# Altium PCB PCB1.PcbDoc
Units mm, origin at the board's own origin, x right, y up, seen from the top; angles counter-clockwise.
Board outline 163.45 x 132.21 mm, 4 copper layers (POWER, PGND/SGND, LOW POWER, SIGNAL), stack 0.603 mm thick; 84 components, 41 nets, 255 pads, 8 vias.
Unrouted connection lines stored in the file: 8.
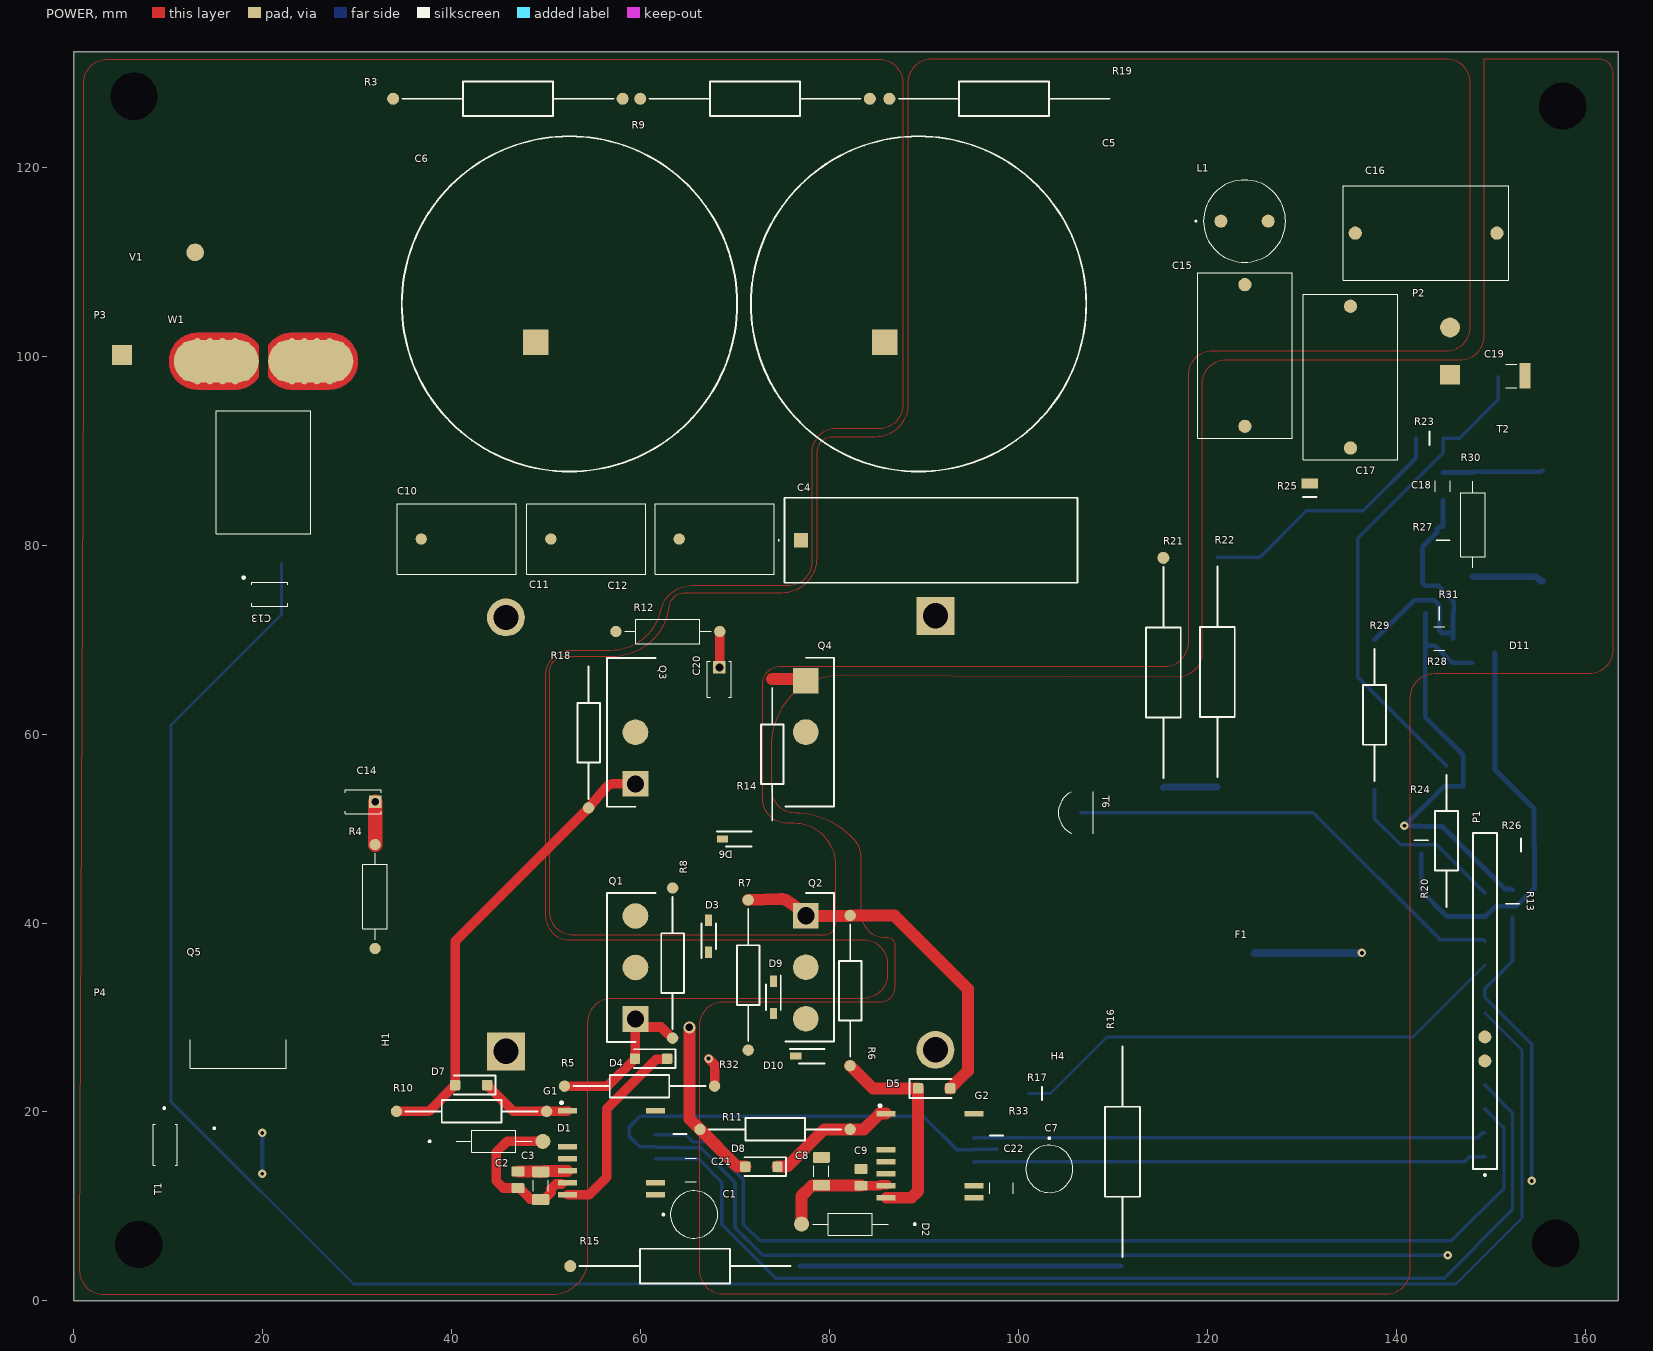
[diagram p0: POWER view]
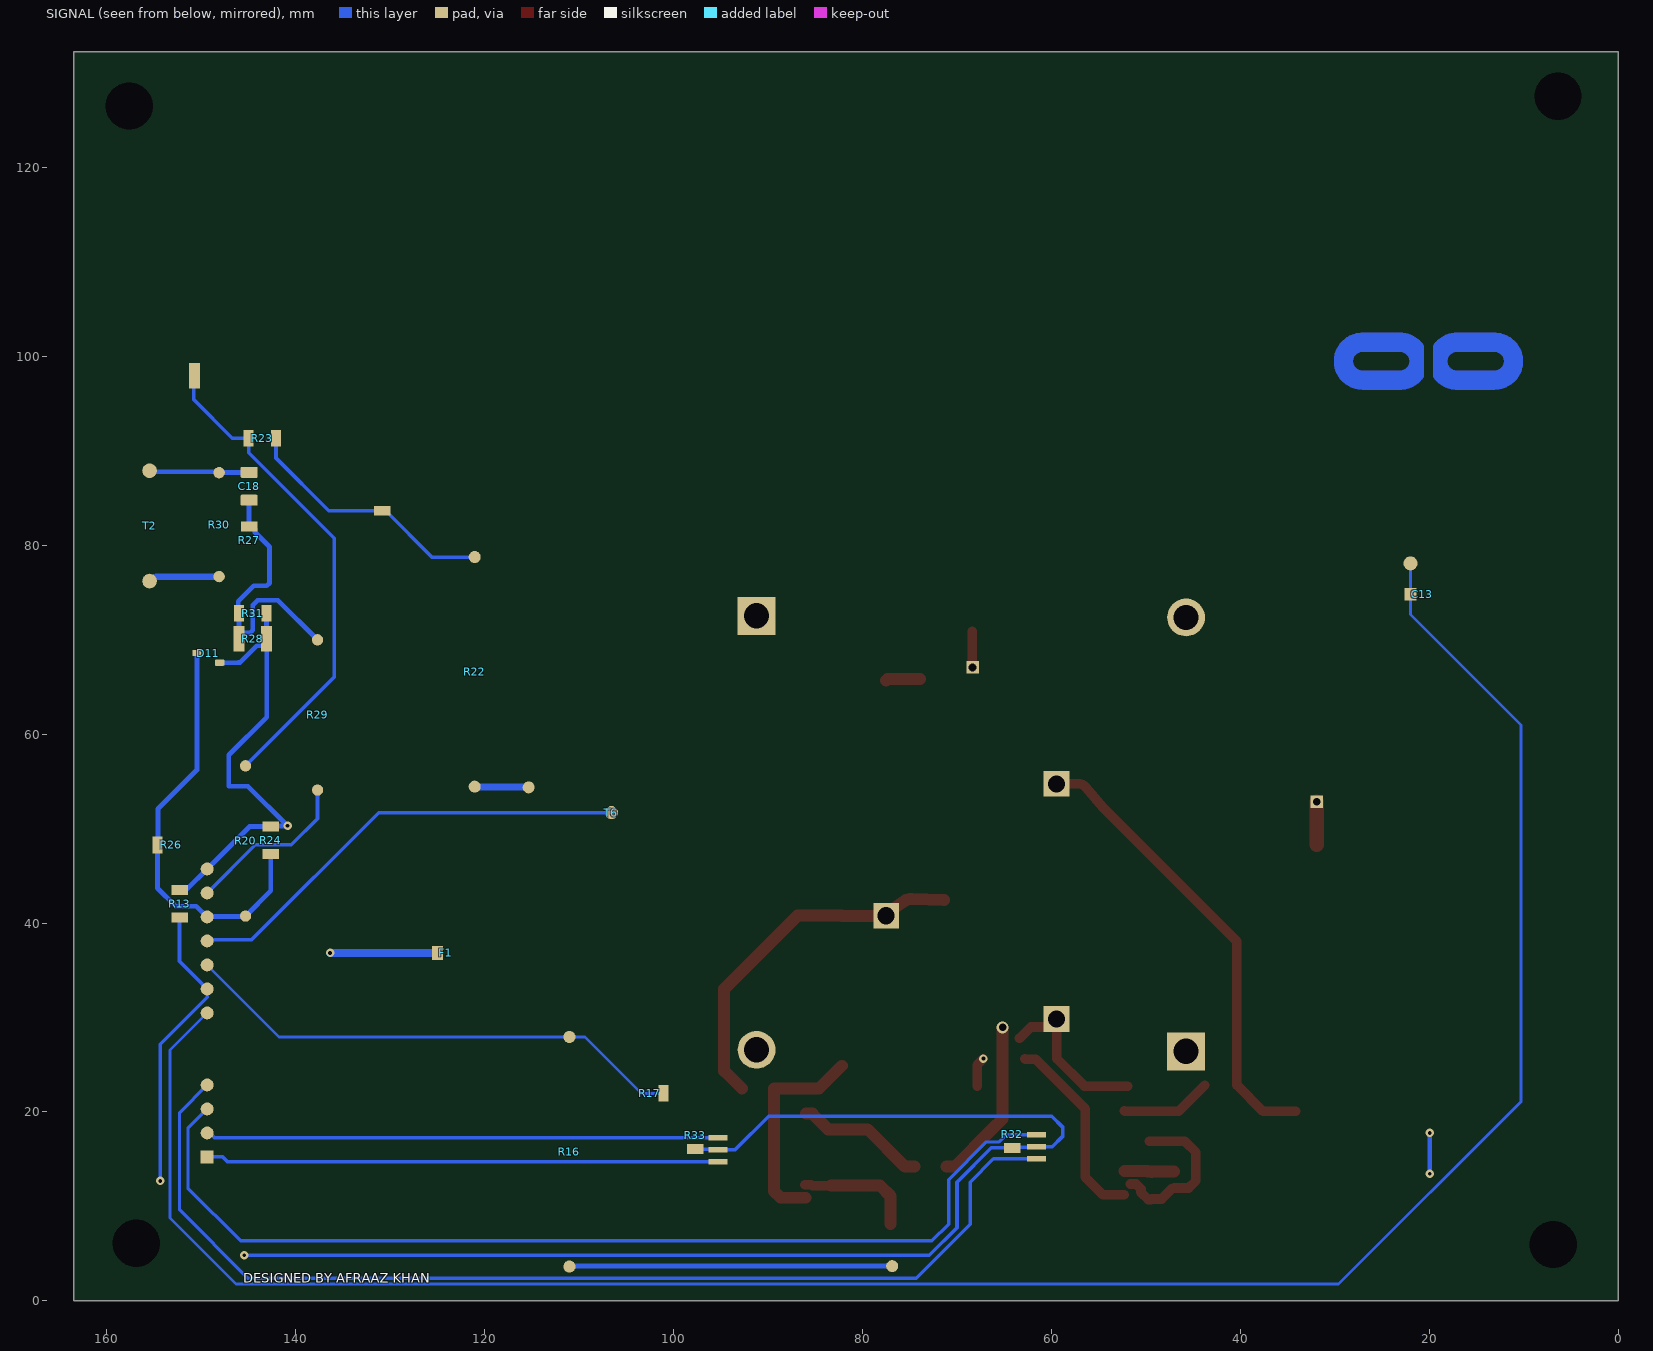
[diagram p1: SIGNAL view, seen from below]
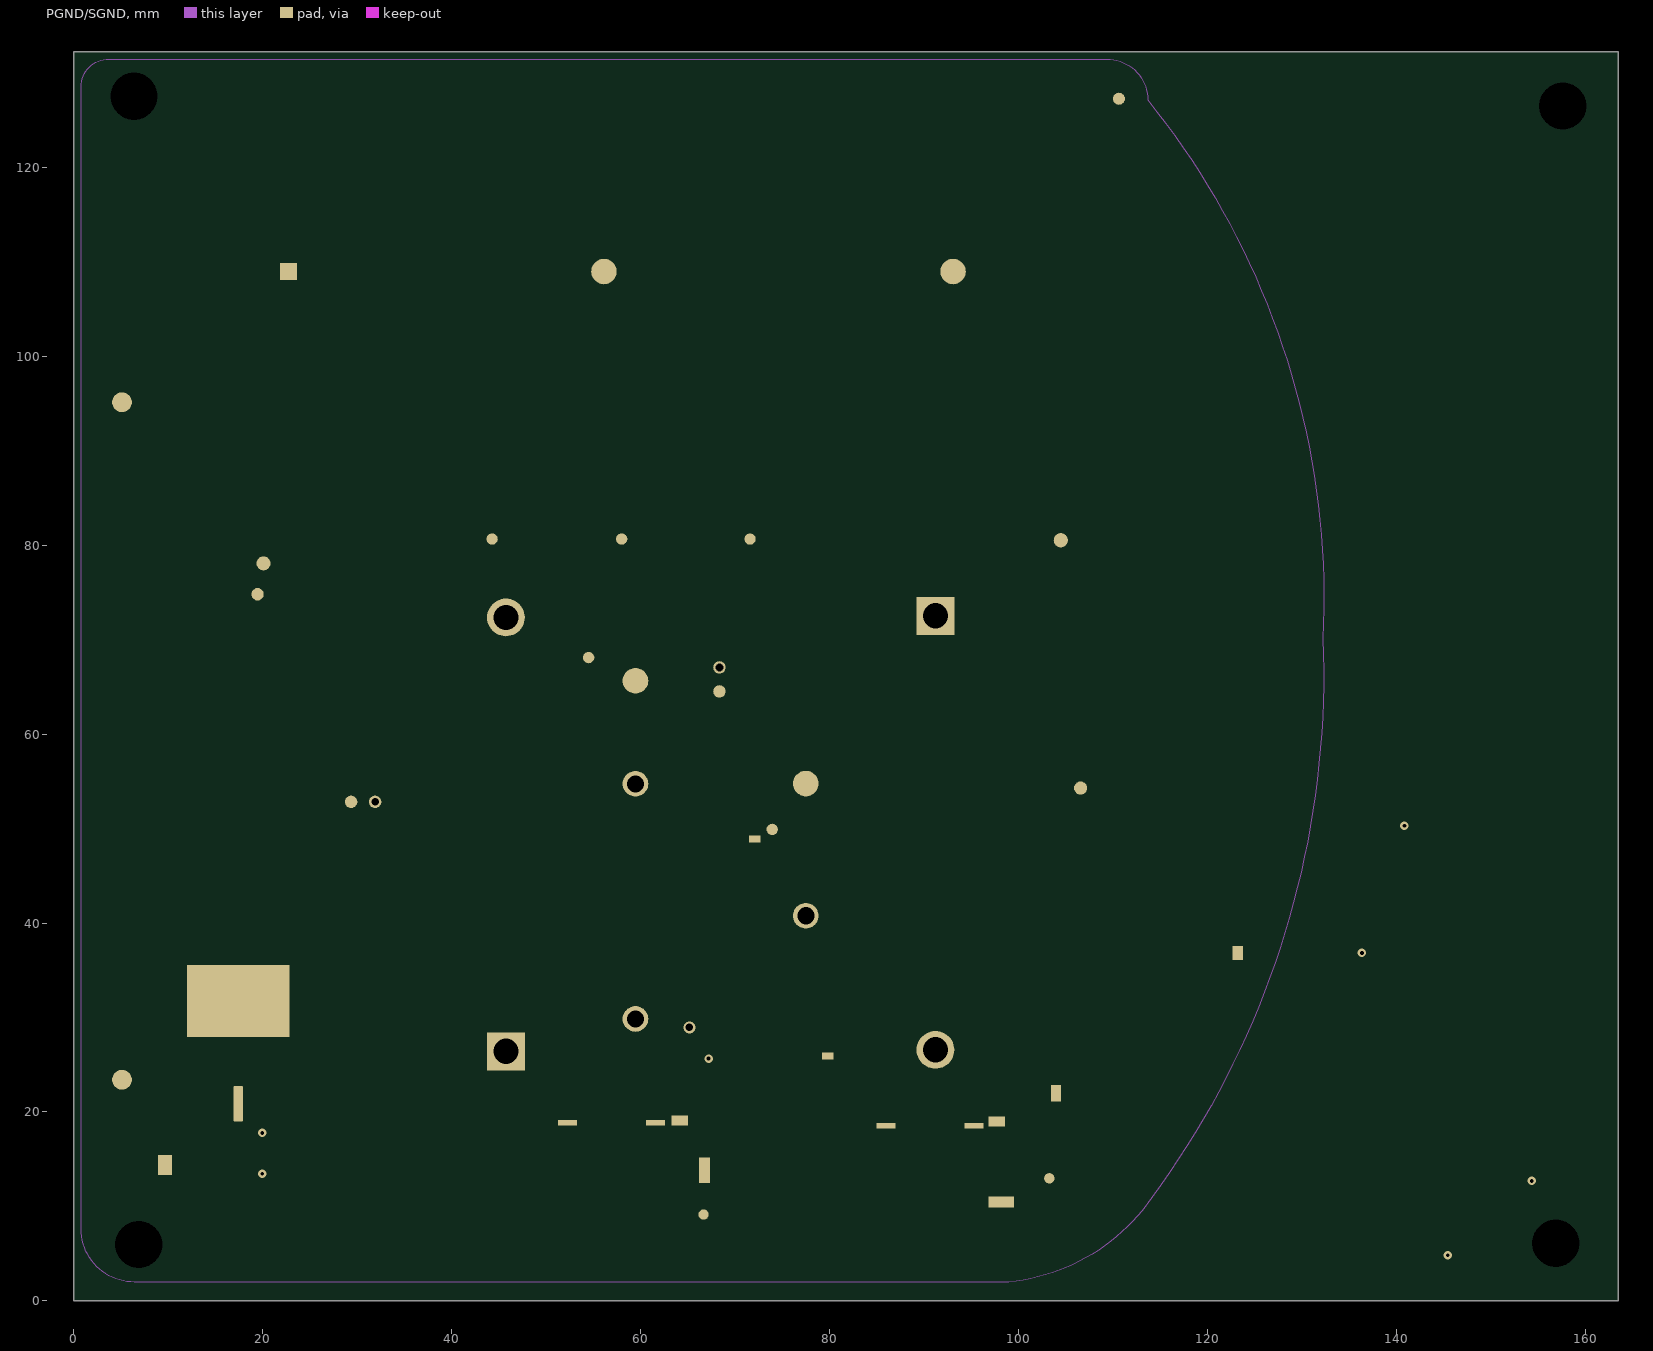
[diagram p2: PGND/SGND]
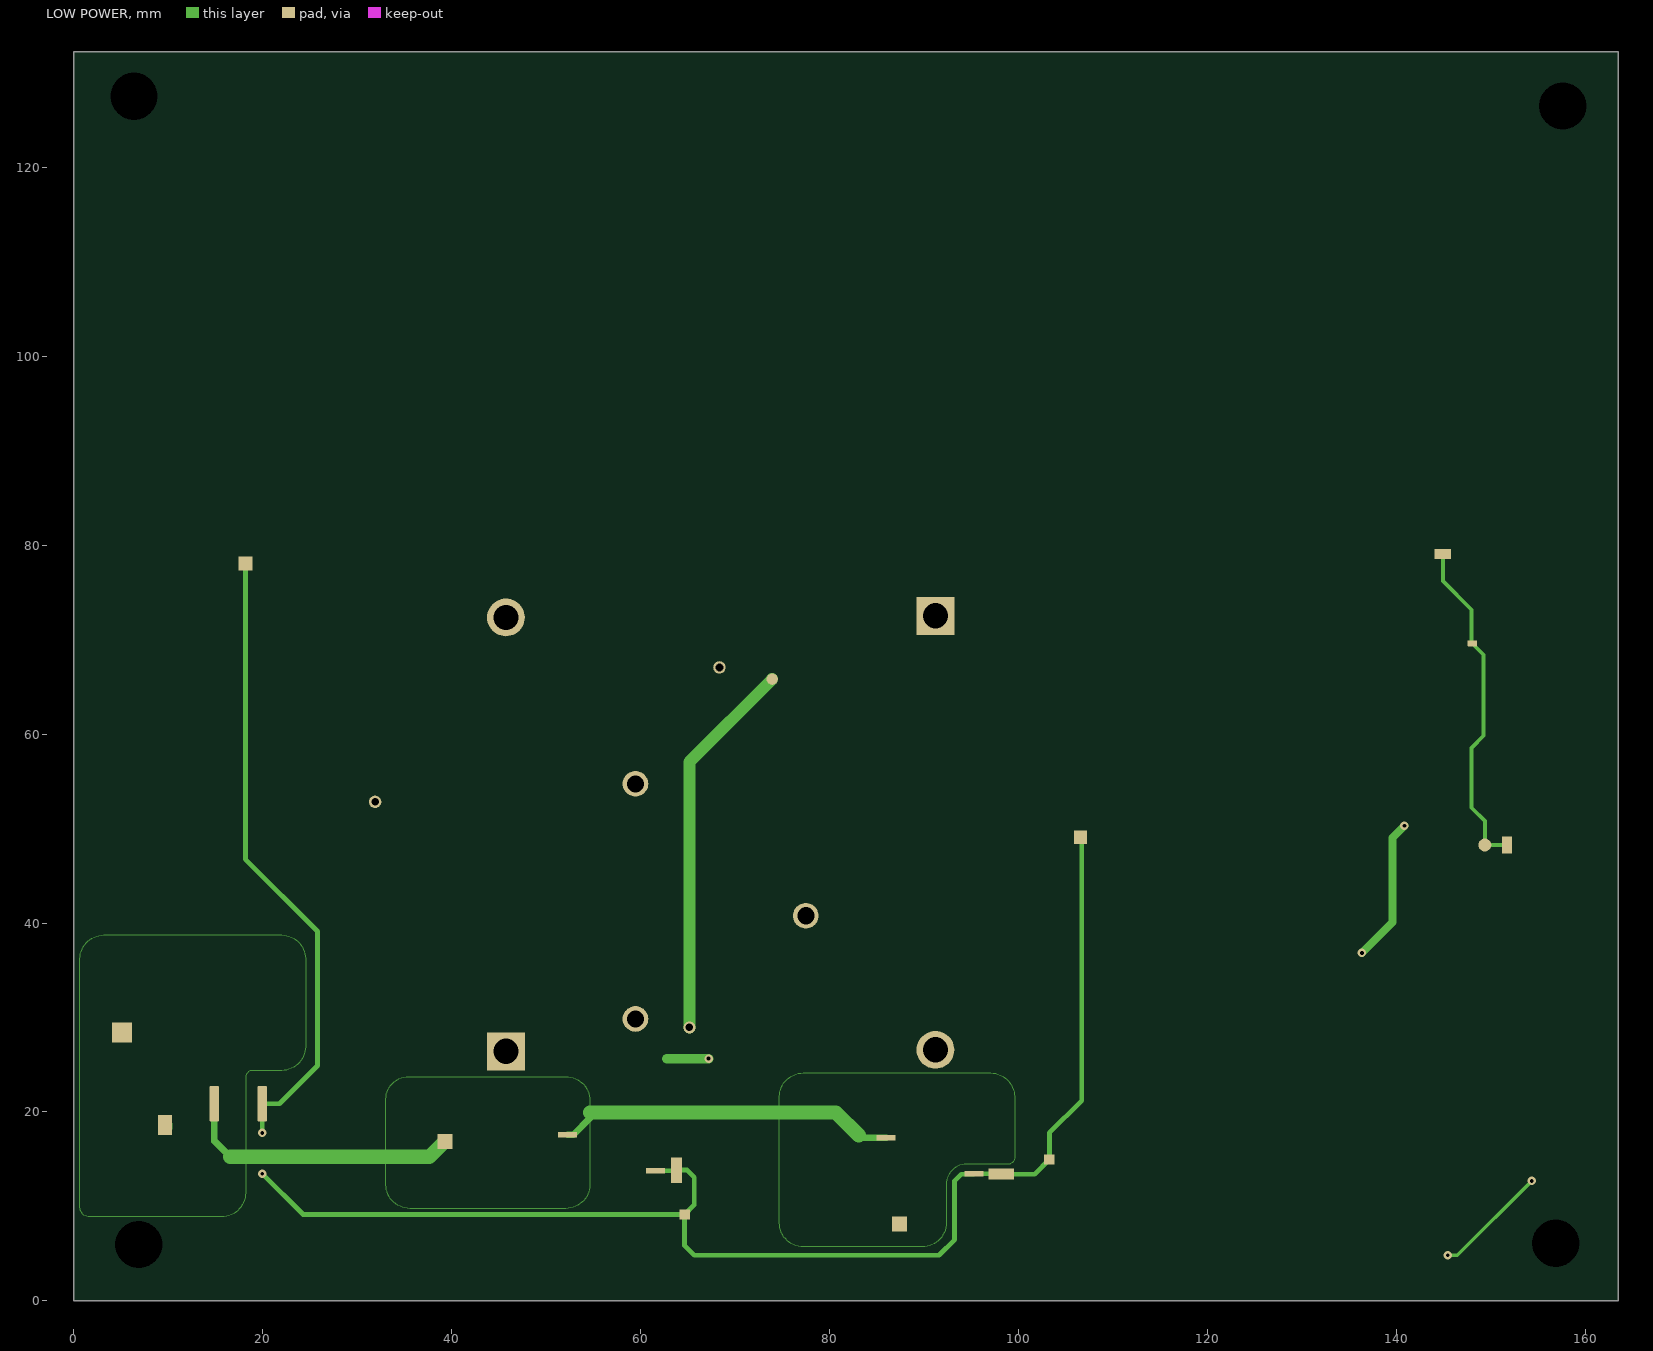
[diagram p3: LOW POWER]
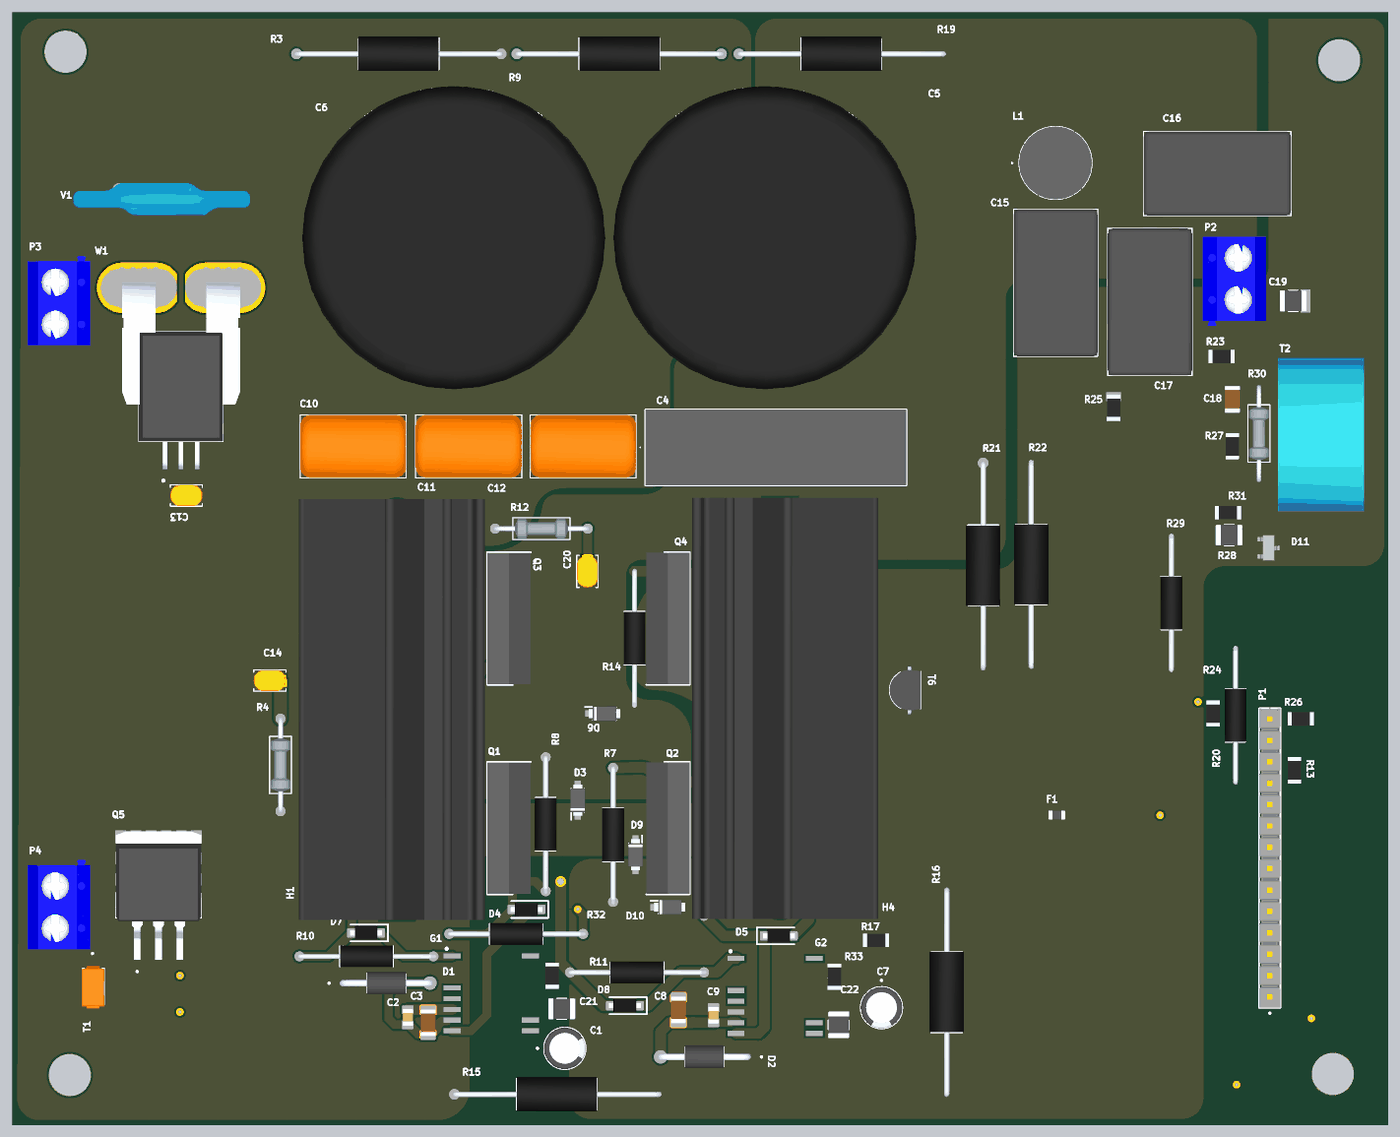
[diagram p4: 3D render of the assembled board from above, using the file's embedded part models]

## Layer stack, top to bottom
Top Solder: solder mask 0.0102, Solder Resist, Dk 3.5
POWER: signal copper 0.0356
Dielectric 2: prepreg 0.0711, PP-006, Dk 4.1
PGND/SGND: signal copper 0.035
Dielectric 1: dielectric 0.32, FR-4, Dk 4.8
LOW POWER: signal copper 0.035
Dielectric 3: prepreg 0.0711, PP-006, Dk 4.1
SIGNAL: signal copper 0.0356
Bottom Solder: solder mask 0.0102, Solder Resist, Dk 3.5

## Board outline
0,0 163.449,0 163.449,132.207 0,132.207

## Design rules (kind name [scope] priority, off if disabled: settings)
Clearance [All] p1: gap=0.254 ignorepadtopadclearanceinfootprint=FALSE
HoleSize [All] p1: absolutevalues=TRUE maxlimit=6 minlimit=0.2 maxpercent=80.000 minpercent=20.000
PolygonConnect [All] p1: connectstyle=Direct reliefconductorwidth=0.254 reliefentries=4 polygonreliefangle="90 Angle" airgapwidth=0.254
RoutingVias [All] p1: holewidth=0.711 width=1.27 viastyle="Through Hole" minholewidth=0.711 minwidth=1.27 maxholewidth=0.711 maxwidth=1.27
SilkToSolderMaskClearance [IsPad] p1: minsilkscreentomaskgap=0.18 clearancetoexposedcopper=TRUE
SolderMaskExpansion [All] p1: expansion=0 istentingtop=FALSE
SupplyNets "Schematic Supply Nets_4" [InNet('+12')] p1: voltage=0.000
SupplyNets "Schematic Supply Nets_3" [InNet('SGND')] p2: voltage=0.000
SupplyNets "Schematic Supply Nets_2" [InNet('+380V')] p3: voltage=0.000
SupplyNets "Schematic Supply Nets_1" [InNet('+5')] p4: voltage=0.000
SupplyNets "Schematic Supply Nets" [InNet('PGND')] p5: voltage=0.000
Width [All] p1: maxlimit=1.524 minlimit=0.254 preferedwidth=0.381 minimp=50.000000 maximp=50.000000 favimp=50.000000
28 further rules are at their usual default settings.

## Components (designator, comment, footprint, x,y, rotation, side; value= is the part's Value field where it differs from the comment)
C1 "22u" 22UF 66.151,10.033 r0 top
C2 "1uF(New)" 1UF(NEW) 46.99,12.827 r270 top
C3 "1uF" 1UF#1 49.53,12.192 r270 top
C4 "1uF Film" 1.0UF/630V 90.043,81.026 r0 top
C5 "470uF/450V" "470 µF/450 V" 88.392,107.061 r0 top
C6 "470uF/450V" "470 µF/450 V" 51.435,107.061 r0 top
C7 "22u" 22UF 104.14,13.462 r270 top
C8 "1uF" 1UF#1 79.248,13.716 r270 top
C9 "1uF(New)" 1UF(NEW) 83.312,13.081 r270 top
C10 "33nF" 33NF 40.259,81.153 r0 top
C11 "33nF" 33NF 53.975,81.153 r0 top
C12 "33nF" 33NF 67.564,81.153 r0 top
C13 "1nF" 1NF#1 20.701,74.676 r180 top
C14 "1nF" 1NF#2 30.607,52.705 r180 top
C15 "2.2uF" 2.2UF 124.079,99.568 r270 top
C16 "2.2uF" 2.2UF 143.637,113.157 r0 top
C17 "2.2uF" 2.2UF 135.255,97.275 r270 top
C18 "1uF" 1UF#2 145.034,86.233 r270 top
C19 "100nF/100V" 100NF/100V#1 152.019,97.917 r0 top
C20 "1nF" 1NF#2 68.453,65.786 r270 top
C21 "100nF/100V" 100NF/100V#2 65.151,13.843 r0 top
C22 "100nF/100V" 100NF/100V#2 98.171,12.065 r270 top
D1 "Rectifier" RECTIFIER 44.45,16.764 r0 top
D2 "Rectifier" RECTIFIER 82.196,8.255 r180 top
D3 "Fast Switching Diode" "FAST SWITCHING DIODE"#1 67.056,38.481 r90 top
D4 "Zener Diode" "ZENER DIODE" 61.341,25.527 r180 top
D5 "Zener Diode" "ZENER DIODE" 90.805,22.606 r0 top
D6 "Fast Switching Diode" "FAST SWITCHING DIODE"#2 70.231,49.022 r0 top
D7 "Zener Diode" "ZENER DIODE" 42.291,22.733 r180 top
D8 "Zener Diode" "ZENER DIODE" 73.025,14.097 r180 top
D9 "Fast Switching Diode" "FAST SWITCHING DIODE"#1 74.168,32.258 r270 top
D10 "Fast Switching Diode" "FAST SWITCHING DIODE"#2 77.978,26.035 r0 top
D11 "Dual Diode" "DUAL DIODE" 149.225,68.453 r0 top
F1 "Ferrite Bead" "FERRITE BEAD" 123.952,36.83 r180 top
G1 "Gate driver" "GATE DRIVER" 56.896,15.494 r0 top
G2 "Gate driver" "GATE DRIVER" 90.614,15.188 r0 top
H1 "Heatsink" HEATSINK 44.704,50.165 r90 top
H4 "Heatsink" HEATSINK 92.202,48.768 r270 top
L1 "2.2mH" 2.2MH 124.206,114.427 r0 top
P1 "14 Pin Connector" "14  PIN CONNECTOR" 149.352,31.242 r90 top
P2 "2 Pin Connector" "2 PIN CONNECTOR"#1 145.288,100.798 r90 top
P3 "2 Pin Connector" "2 PIN CONNECTOR"#2 5.461,97.369 r270 top
P4 "2 Pin Connector" "2 PIN CONNECTOR"#3 5.461,25.654 r270 top
Q1 "Mosfet" MOSFET#1 58.801,34.798 r90 top
Q2 "Mosfet" MOSFET#1 78.105,35.814 r270 top
Q3 "Mosfet" MOSFET#2 58.801,59.69 r90 top
Q4 "Mosfet" MOSFET#3 78.105,60.706 r270 top
Q5 "12 TO 5" "12 TO 5" 17.272,27.905 r90 top
R3 "1M" 1M#1 44.958,127.127 r0 top
R4 "100" 100 32.004,42.291 r270 top
R5 "22" 22 59.817,22.86 r180 top
R6 "22" 22 82.296,32.893 r90 top
R7 "1K" 1K#1 71.501,33.782 r90 top
R8 "1K" 1K#1 63.5,35.052 r90 top
R9 "1M" 1M#1 73.068,127.381 r180 top
R10 "22" 22 42.037,20.193 r180 top
R11 "22" 22 74.168,18.288 r180 top
R12 "100" 100 62.357,70.739 r180 top
R13 "10k" 10K#1 152.273,42.037 r270 top
R14 "1K" 1K#2 74.041,57.15 r90 top
R15 "1M" 1M#2 65.659,3.81 r180 top
R16 "1M" 1M#3 110.871,16.764 r270 top
R17 "10k" 10K#2 102.489,21.971 r180 top
R18 "1K" 1K#3 54.61,59.436 r90 top
R19 "1M" 1M#4 99.441,127.381 r180 top
R20 "1K" 1K#4 145.161,49.403 r270 top
R21 "1M" 1M#2 115.443,65.532 r90 top
R22 "1M" 1M#3 120.904,67.564 r270 top
R23 "10k" 10K#1 143.51,91.313 r180 top
R24 "10k" 10K#1 142.621,48.768 r270 top
R25 "10k" 10K#3 130.81,85.09 r270 top
R26 "10k" 10K#4 153.162,48.26 r0 top
R27 "10k" 10K#5 144.907,80.518 r270 top
R28 "100nF/100V" 100NF/100V#3 144.653,70.104 r180 top
R29 "1K" 1K#4 137.541,62.738 r270 top
R30 "50" 50 148.082,81.407 r90 top
R31 "10k" 10K#1 144.526,72.771 r0 top
R32 "10k" 10K#2 64.135,17.653 r270 top
R33 "10k" 10K#2 97.663,17.526 r270 top
T1 "TVS" TVS 9.779,16.51 r270 top
T2 "Current Transform" "CURRENT TRANSFORMER" 155.702,82.042 r0 top
T6 "Temp Sensor" "TEMP SENSOR" 106.553,51.689 r90 top
V1 "MOV" MOV 18.288,109.855 r180 top
W1 "Current sensor" "CURRENT SENSOR" 20.32,89.916 r0 top

## Footprints (in the part's own frame and the unit in brackets; to place one, negate y for a bottom-side part, rotate by r counter-clockwise, add the part's x,y. Pads: shape width x height; smd on the part's side, far side on the other; paste and mask are expansions set on the pad)
1.0UF/630V [mm] "ECW-FE2J105QD"
  rect 1.5x1.5 smd: 1(-13.081,-0.508)
  round 1.5 on Mid1: 2(14.419,-0.508)
  silkscreen extent -15.48,-5.01 16.17,3.99, body extent -14.83,-5.01 16.17,3.99, height 19.6
1K#1 [mm]
  round 1.2 smd: 1(-7.239,0.127) 2(8.661,0.127)
  silkscreen extent -6.29,-1.07 7.71,1.33, body extent -7.54,-1.16 8.96,1.42, height 2.6
1K#2 [mm]
  round 1.2 on Mid1: 1(-7.239,0.127)
  round 1.2 on Mid2: 2(8.661,0.127)
  silkscreen extent -6.29,-1.07 7.71,1.33, body extent -7.54,-1.16 8.96,1.42, height 2.6
1K#3 [mm]
  round 1.2 smd: 1(-7.239,0.127)
  round 1.2 on Mid1: 2(8.661,0.127)
  silkscreen extent -6.29,-1.07 7.71,1.33, body extent -7.54,-1.16 8.96,1.42, height 2.6
1K#4 [mm]
  round 1.2 smd far side: 1(-7.239,0.127) 2(8.661,0.127)
  silkscreen extent -6.29,-1.07 7.71,1.33, body extent -7.54,-1.16 8.96,1.42, height 2.6
1M#1 [mm]
  round 1.275 smd: 1(-11.176,0.127) 2(13.124,0.127)
  silkscreen extent -10.19,-1.71 12.14,1.97, body extent -11.5,-1.91 13.39,2.17, height 4.08
1M#2 [mm]
  round 1.275 smd far side: 1(-11.176,0.127)
  round 1.275 smd: 2(13.124,0.127)
  silkscreen extent -10.19,-1.71 12.14,1.97, body extent -11.5,-1.91 13.39,2.17, height 4.08
1M#3 [mm]
  round 1.275 smd far side: 1(-11.176,0.127) 2(13.124,0.127)
  silkscreen extent -10.19,-1.71 12.14,1.97, body extent -11.5,-1.91 13.39,2.17, height 4.08
1M#4 [mm]
  round 1.275 on Mid1: 1(-11.176,0.127)
  round 1.275 smd: 2(13.124,0.127)
  silkscreen extent -10.19,-1.71 12.14,1.97, body extent -11.5,-1.91 13.39,2.17, height 4.08
1NF#1 [mil]
  rect 51.89x51.89 smd far side mask+4.02: 1(-50,-5)
  round 51.89 on Mid1 mask+4.02: 2(50,-5)
  silkscreen extent -75,-55 75,45, body extent -75,-55 75,45, height 183
1NF#2 [mil]
  rect 51.89x51.89 / inner round 51.89 / far side rect 51.89x51.89 hole 31.89 mask+4.02: 1(-50,-5)
  round 51.89 on Mid1 mask+4.02: 2(50,-5)
  silkscreen extent -75,-55 75,45, body extent -75,-55 75,45, height 183
1UF#1 [mm] "C1206C105K1RACTU"
  rrect25% 1.16x1.82 smd paste+0 mask+0.102: 1(-1.475,-0.127) 2(1.475,-0.127)
  silkscreen extent -0.58,-0.93 0.58,0.67, body extent -1.6,-1.02 1.6,0.78, height 1.59
1UF#2 [mm] "C1206C105K1RACTU"
  rrect25% 1.16x1.82 smd far side paste+0 mask+0.102: 1(-1.475,-0.127) 2(1.475,-0.127)
  silkscreen extent -0.58,-0.93 0.58,0.67, body extent -1.6,-1.02 1.6,0.78, height 1.59
1UF(NEW) [mm]
  rrect25% 1.05x1.38 smd: 1(-0.888,0) 2(0.888,0)
  body extent -1,-0.63 1,0.63, height 1.35
"2 PIN CONNECTOR"#1 [mm] "KF301-2P"
  rect 2.1x2.1 smd: 1(-2.754,-0.381)
  round 2.1 smd: 2(2.246,-0.381)
  body extent -5.85,-3.62 4.75,3.88, height 10
"2 PIN CONNECTOR"#2 [mm] "KF301-2P"
  rect 2.1x2.1 smd: 1(-2.754,-0.381)
  round 2.1 on Mid1: 2(2.246,-0.381)
  body extent -5.85,-3.62 4.75,3.88, height 10
"2 PIN CONNECTOR"#3 [mm] "KF301-2P"
  rect 2.1x2.1 on Mid2: 1(-2.754,-0.381)
  round 2.1 on Mid1: 2(2.246,-0.381)
  body extent -5.85,-3.62 4.75,3.88, height 10
2.2MH [mil]
  round 54.37 smd: 1(-110,-5) 2(86.85,-5)
  silkscreen extent -216,-176 160,166, body extent -183,-176 160,166, height 516
2.2UF [mm]
  round 1.4 smd: 1(-8.008,-0.127) 2(6.992,-0.127)
  silkscreen extent -9.26,-5.13 8.24,4.87, body extent -9.26,-5.13 8.24,4.87, height 15.5
10K#1 [mm] "RC1206FR-0710KL"
  rect 1.05x1.75 smd far side: 1(-1.45,0) 2(1.45,0)
  silkscreen extent 0,-0.7 0,0.7, body extent -1.68,-0.8 1.42,0.8, height 0.65
10K#2 [mm] "RC1206FR-0710KL"
  rect 1.05x1.75 on Mid1: 1(-1.45,0)
  rect 1.05x1.75 smd far side: 2(1.45,0)
  silkscreen extent 0,-0.7 0,0.7, body extent -1.68,-0.8 1.42,0.8, height 0.65
10K#3 [mm] "RC1206FR-0710KL"
  rect 1.05x1.75 smd: 1(-1.45,0)
  rect 1.05x1.75 smd far side: 2(1.45,0)
  silkscreen extent 0,-0.7 0,0.7, body extent -1.68,-0.8 1.42,0.8, height 0.65
10K#4 [mm] "RC1206FR-0710KL"
  rect 1.05x1.75 on Mid2: 1(-1.45,0)
  rect 1.05x1.75 smd far side: 2(1.45,0)
  silkscreen extent 0,-0.7 0,0.7, body extent -1.68,-0.8 1.42,0.8, height 0.65
10K#5 [mm] "RC1206FR-0710KL"
  rect 1.05x1.75 smd far side: 1(-1.45,0)
  rect 1.05x1.75 on Mid2: 2(1.45,0)
  silkscreen extent 0,-0.7 0,0.7, body extent -1.68,-0.8 1.42,0.8, height 0.65
"12 TO 5" [mm]
  rrect25% 3.79x0.99 on Mid2: 1(-7.035,2.413) 3(-7.035,-2.667)
  rrect25% 3.79x0.99 on Mid1: 2(-7.035,-0.127)
  rect 7.62x10.84 on Mid1 paste-6: 4(3.845,-0.127)
  silkscreen extent -9.73,-5.21 -0.29,4.95, body extent -8.26,-5.21 6.98,4.95, height 4.83
"14  PIN CONNECTOR" [mm]
  rect 1.37x1.37 smd far side: 1(-16.002,0)
  round 1.37 smd far side: 2(-13.462,0) 3(-10.922,0) 4(-8.382,0) 7(-0.762,0) 8(1.778,0) 9(4.318,0) 10(6.858,0) 11(9.398,0) 12(11.938,0) 13(14.478,0)
  round 1.37 smd: 5(-5.842,0) 6(-3.302,0)
  round 1.37 on Mid2: 14(17.018,0)
  silkscreen extent -18.02,-1.27 18.29,1.27, body extent -17.27,-1.27 18.41,1.27, height 8.38
22 [mm]
  round 1.2 smd: 1(-8.001,0.127) 2(7.899,0.127)
  silkscreen extent -7.05,-1.07 6.95,1.33, body extent -8.3,-1.16 8.2,1.42, height 2.6
22UF [mm]
  round 1.1 on Mid1: N(0.492,-0.889)
  rect 1.1x1.1 on Mid2: P(-1.508,-0.889)
  silkscreen extent -3.86,-3.39 1.99,1.61, body extent -3.01,-3.39 1.99,1.61, height 11
33NF [mm]
  round 1.2 smd: 1(-3.496,-0.508)
  round 1.2 on Mid1: 2(4.004,-0.508)
  silkscreen extent -6.05,-4.26 6.55,3.24, body extent -6.05,-4.26 6.55,3.24, height 15.5
50 [mm]
  round 1.2 smd far side: 1(-4.738,0) 2(6.262,0)
  silkscreen extent -3.82,-1.3 5.34,1.3, body extent -5.01,-1.2 6.54,1.2, height 2.39
100 [mm]
  round 1.2 smd: 1(-6.008,-0.127) 2(4.992,-0.127)
  silkscreen extent -5.09,-1.43 4.07,1.17, body extent -6.28,-1.33 5.27,1.07, height 2.4
100NF/100V#1 [mm] "C1210C104K1RACAUTO"
  rect 1.16x2.72 smd far side: 1(-1.348,0)
  rect 1.16x2.72 smd: 2(1.602,0)
  silkscreen extent -0.44,-1.25 0.7,1.25, body extent -1.47,-1.25 1.73,1.25, height 2.7
100NF/100V#2 [mm] "C1210C104K1RACAUTO"
  rect 1.16x2.72 on Mid2: 1(-1.348,0)
  rect 1.16x2.72 on Mid1: 2(1.602,0)
  silkscreen extent -0.44,-1.25 0.7,1.25, body extent -1.47,-1.25 1.73,1.25, height 2.7
100NF/100V#3 [mm] "C1210C104K1RACAUTO"
  rect 1.16x2.72 smd far side: 1(-1.348,0) 2(1.602,0)
  silkscreen extent -0.44,-1.25 0.7,1.25, body extent -1.47,-1.25 1.73,1.25, height 2.7
"470 µF/450 V" [mm] "ELG477M450AT6AA"
  rect 2.7x2.7 smd: 1(-2.54,-5.588)
  round 2.7 on Mid1: 2(4.666,1.905)
  silkscreen extent -16.73,-19.27 18.77,16.23, body extent -16.98,-19.65 19.02,16.35, height 53.34
"CURRENT SENSOR" [mm]
  rect 1.5x1.5 on Mid2: 1(-2.164,-11.843)
  round 1.5 on Mid1: 2(-0.254,-11.843)
  round 1.5 smd far side: 3(1.656,-11.843)
  oval 9x4.5 smd mask+0: 4(4.746,9.557) 5(-5.254,9.557)
  round 0.8 smd: 4_1(2.746,7.507) 4_2(4.076,7.507) 4_3(5.406,7.507) 4_4(6.736,7.507) 4_5(7.951,7.899) 4_6(8.696,8.924) 4_7(8.696,10.19) 4_8(7.951,11.215) 4_9(6.736,11.607) 4_10(5.406,11.607) 4_11(4.076,11.607) 4_12(2.746,11.607) 4_13(1.541,11.215) 4_14(0.796,10.19) 4_15(0.796,8.924) 4_16(1.541,7.899) 5_1(-7.254,7.507) 5_2(-5.924,7.507) 5_3(-4.594,7.507) 5_4(-3.264,7.507) 5_5(-8.459,7.899) 5_6(-9.204,10.19) 5_7(-9.204,8.924) 5_8(-8.459,11.215) 5_9(-7.254,11.607) 5_10(-5.924,11.607) 5_11(-4.594,11.607) 5_12(-3.264,11.607) 5_13(-2.049,11.215) 5_14(-1.304,10.19) 5_15(-1.304,8.924) 5_16(-2.049,7.899)
  POWER region: -5.254,10.557 -7.254,10.557 -7.306,10.556 -7.359,10.552 -7.41,10.545 -7.462,10.535 -7.513,10.523 -7.563,10.508 -7.612,10.491 -7.661,10.471 -7.708,10.448 -7.754,10.423 -7.799,10.396 -7.842,10.366 -7.883,10.334 -7.923,10.3 -7.961,10.264 -7.997,10.226 -8.031,10.186 -8.063,10.145 -8.093,10.102 -8.12,10.057 -8.145,10.011 -8.168,9.964 -8.188,9.915 -8.205,9.866 -8.22,9.816 -8.232,9.765 -8.242,9.713 -8.249,9.662 -8.253,9.609 -8.254,9.557 -8.253,9.505 -8.249,9.452 -8.242,9.401 -8.232,9.349 -8.22,9.298 -8.205,9.248 -8.188,9.199 -8.168,9.15 -8.145,9.103 -8.12,9.057 -8.093,9.012 -8.063,8.969 -8.031,8.928 -7.997,8.888 -7.961,8.85 -7.923,8.814 -7.883,8.78 -7.842,8.748 -7.799,8.718 -7.754,8.691 -7.708,8.666 -7.661,8.643 -7.612,8.623 -7.563,8.606 -7.513,8.591 -7.462,8.579 -7.41,8.569 -7.359,8.562 -7.306,8.558 -7.254,8.557 -5.254,8.557 -5.254,6.557 -7.254,6.557 -7.411,6.561 -7.568,6.573 -7.723,6.594 -7.878,6.623 -8.03,6.659 -8.181,6.704 -8.329,6.756 -8.474,6.816 -8.616,6.884 -8.754,6.959 -8.888,7.041 -9.017,7.13 -9.142,7.226 -9.261,7.328 -9.375,7.436 -9.483,7.55 -9.585,7.669 -9.681,7.794 -9.77,7.923 -9.852,8.057 -9.927,8.195 -9.995,8.337 -10.055,8.482 -10.107,8.63 -10.152,8.781 -10.188,8.933 -10.217,9.088 -10.238,9.243 -10.25,9.4 -10.254,9.557 -10.25,9.714 -10.238,9.871 -10.217,10.026 -10.188,10.181 -10.152,10.333 -10.107,10.484 -10.055,10.632 -9.995,10.777 -9.927,10.919 -9.852,11.057 -9.77,11.191 -9.681,11.32 -9.585,11.445 -9.483,11.564 -9.375,11.678 -9.261,11.786 -9.142,11.888 -9.017,11.984 -8.888,12.073 -8.754,12.155 -8.616,12.23 -8.474,12.298 -8.329,12.358 -8.181,12.41 -8.03,12.455 -7.878,12.491 -7.723,12.52 -7.568,12.541 -7.411,12.553 -7.254,12.557 -5.254,12.557
  POWER region: -3.066,12.554 -2.968,12.547 -2.87,12.537 -2.772,12.524 -2.675,12.507 -2.578,12.488 -2.482,12.465 -2.387,12.438 -2.293,12.409 -2.199,12.376 -2.107,12.34 -2.017,12.302 -1.927,12.26 -1.839,12.215 -1.753,12.167 -1.668,12.116 -1.585,12.063 -1.504,12.007 -1.425,11.948 -1.348,11.886 -1.273,11.822 -1.2,11.755 -1.13,11.686 -1.062,11.615 -0.996,11.541 -0.933,11.465 -0.872,11.387 -0.814,11.307 -0.754,11.217 -0.754,7.897 -0.814,7.807 -0.872,7.727 -0.933,7.649 -0.996,7.573 -1.062,7.499 -1.13,7.428 -1.2,7.359 -1.273,7.292 -1.348,7.228 -1.425,7.166 -1.504,7.107 -1.585,7.051 -1.668,6.998 -1.753,6.947 -1.839,6.899 -1.927,6.854 -2.017,6.812 -2.107,6.774 -2.199,6.738 -2.293,6.705 -2.387,6.676 -2.482,6.649 -2.578,6.626 -2.675,6.607 -2.772,6.59 -2.87,6.577 -2.968,6.567 -3.066,6.56 -3.165,6.557 -5.254,6.557 -5.254,8.557 -3.254,8.557 -3.202,8.558 -3.149,8.562 -3.098,8.569 -3.046,8.579 -2.995,8.591 -2.945,8.606 -2.896,8.623 -2.847,8.643 -2.8,8.666 -2.754,8.691 -2.709,8.718 -2.666,8.748 -2.625,8.78 -2.585,8.814 -2.547,8.85 -2.511,8.888 -2.477,8.928 -2.445,8.969 -2.415,9.012 -2.388,9.057 -2.363,9.103 -2.34,9.15 -2.32,9.199 -2.303,9.248 -2.288,9.298 -2.276,9.349 -2.266,9.401 -2.259,9.452 -2.255,9.505 -2.254,9.557 -2.255,9.609 -2.259,9.662 -2.266,9.713 -2.276,9.765 -2.288,9.816 -2.303,9.866 -2.32,9.915 -2.34,9.964 -2.363,10.011 -2.388,10.057 -2.415,10.102 -2.445,10.145 -2.477,10.186 -2.511,10.226 -2.547,10.264 -2.585,10.3 -2.625,10.334 -2.666,10.366 -2.709,10.396 -2.754,10.423 -2.8,10.448 -2.847,10.471 -2.896,10.491 -2.945,10.508 -2.995,10.523 -3.046,10.535 -3.098,10.545 -3.149,10.552 -3.202,10.556 -3.254,10.557 -5.254,10.557 -5.254,12.557 -3.165,12.557
  POWER region: 4.746,10.557 2.746,10.557 2.694,10.556 2.641,10.552 2.59,10.545 2.538,10.535 2.487,10.523 2.437,10.508 2.388,10.491 2.339,10.471 2.292,10.448 2.246,10.423 2.201,10.396 2.158,10.366 2.117,10.334 2.077,10.3 2.039,10.264 2.003,10.226 1.969,10.186 1.937,10.145 1.907,10.102 1.88,10.057 1.855,10.011 1.832,9.964 1.812,9.915 1.795,9.866 1.78,9.816 1.768,9.765 1.758,9.713 1.751,9.662 1.747,9.609 1.746,9.557 1.747,9.505 1.751,9.452 1.758,9.401 1.768,9.349 1.78,9.298 1.795,9.248 1.812,9.199 1.832,9.15 1.855,9.103 1.88,9.057 1.907,9.012 1.937,8.969 1.969,8.928 2.003,8.888 2.039,8.85 2.077,8.814 2.117,8.78 2.158,8.748 2.201,8.718 2.246,8.691 2.292,8.666 2.339,8.643 2.388,8.623 2.437,8.606 2.487,8.591 2.538,8.579 2.59,8.569 2.641,8.562 2.694,8.558 2.746,8.557 4.746,8.557 4.746,6.557 2.657,6.557 2.558,6.56 2.46,6.567 2.362,6.577 2.264,6.59 2.167,6.607 2.07,6.626 1.974,6.649 1.879,6.676 1.785,6.705 1.691,6.738 1.599,6.774 1.509,6.812 1.419,6.854 1.331,6.899 1.245,6.947 1.16,6.998 1.077,7.051 0.996,7.107 0.917,7.166 0.84,7.228 0.765,7.292 0.692,7.359 0.622,7.428 0.554,7.499 0.488,7.573 0.425,7.649 0.364,7.727 0.306,7.807 0.246,7.897 0.246,11.217 0.306,11.307 0.364,11.387 0.425,11.465 0.488,11.541 0.554,11.615 0.622,11.686 0.692,11.755 0.765,11.822 0.84,11.886 0.917,11.948 0.996,12.007 1.077,12.063 1.16,12.116 1.245,12.167 1.331,12.215 1.419,12.26 1.509,12.302 1.599,12.34 1.691,12.376 1.785,12.409 1.879,12.438 1.974,12.465 2.07,12.488 2.167,12.507 2.264,12.524 2.362,12.537 2.46,12.547 2.558,12.554 2.657,12.557 4.746,12.557
  POWER region: 6.903,12.553 7.06,12.541 7.215,12.52 7.37,12.491 7.522,12.455 7.673,12.41 7.821,12.358 7.966,12.298 8.108,12.23 8.246,12.155 8.38,12.073 8.509,11.984 8.634,11.888 8.753,11.786 8.867,11.678 8.975,11.564 9.077,11.445 9.173,11.32 9.262,11.191 9.344,11.057 9.419,10.919 9.487,10.777 9.547,10.632 9.599,10.484 9.644,10.333 9.68,10.181 9.709,10.026 9.73,9.871 9.742,9.714 9.746,9.557 9.742,9.4 9.73,9.243 9.709,9.088 9.68,8.933 9.644,8.781 9.599,8.63 9.547,8.482 9.487,8.337 9.419,8.195 9.344,8.057 9.262,7.923 9.173,7.794 9.077,7.669 8.975,7.55 8.867,7.436 8.753,7.328 8.634,7.226 8.509,7.13 8.38,7.041 8.246,6.959 8.108,6.884 7.966,6.816 7.821,6.756 7.673,6.704 7.522,6.659 7.37,6.623 7.215,6.594 7.06,6.573 6.903,6.561 6.746,6.557 4.746,6.557 4.746,8.557 6.746,8.557 6.798,8.558 6.851,8.562 6.902,8.569 6.954,8.579 7.005,8.591 7.055,8.606 7.104,8.623 7.153,8.643 7.2,8.666 7.246,8.691 7.291,8.718 7.334,8.748 7.375,8.78 7.415,8.814 7.453,8.85 7.489,8.888 7.523,8.928 7.555,8.969 7.585,9.012 7.612,9.057 7.637,9.103 7.66,9.15 7.68,9.199 7.697,9.248 7.712,9.298 7.724,9.349 7.734,9.401 7.741,9.452 7.745,9.505 7.746,9.557 7.745,9.609 7.741,9.662 7.734,9.713 7.724,9.765 7.712,9.816 7.697,9.866 7.68,9.915 7.66,9.964 7.637,10.011 7.612,10.057 7.585,10.102 7.555,10.145 7.523,10.186 7.489,10.226 7.453,10.264 7.415,10.3 7.375,10.334 7.334,10.366 7.291,10.396 7.246,10.423 7.2,10.448 7.153,10.471 7.104,10.491 7.055,10.508 7.005,10.523 6.954,10.535 6.902,10.545 6.851,10.552 6.798,10.556 6.746,10.557 4.746,10.557 4.746,12.557 6.746,12.557
  SIGNAL region: -5.254,10.557 -7.254,10.557 -7.306,10.556 -7.359,10.552 -7.41,10.545 -7.462,10.535 -7.513,10.523 -7.563,10.508 -7.612,10.491 -7.661,10.471 -7.708,10.448 -7.754,10.423 -7.799,10.396 -7.842,10.366 -7.883,10.334 -7.923,10.3 -7.961,10.264 -7.997,10.226 -8.031,10.186 -8.063,10.145 -8.093,10.102 -8.12,10.057 -8.145,10.011 -8.168,9.964 -8.188,9.915 -8.205,9.866 -8.22,9.816 -8.232,9.765 -8.242,9.713 -8.249,9.662 -8.253,9.609 -8.254,9.557 -8.253,9.505 -8.249,9.452 -8.242,9.401 -8.232,9.349 -8.22,9.298 -8.205,9.248 -8.188,9.199 -8.168,9.15 -8.145,9.103 -8.12,9.057 -8.093,9.012 -8.063,8.969 -8.031,8.928 -7.997,8.888 -7.961,8.85 -7.923,8.814 -7.883,8.78 -7.842,8.748 -7.799,8.718 -7.754,8.691 -7.708,8.666 -7.661,8.643 -7.612,8.623 -7.563,8.606 -7.513,8.591 -7.462,8.579 -7.41,8.569 -7.359,8.562 -7.306,8.558 -7.254,8.557 -5.254,8.557 -5.254,6.557 -7.254,6.557 -7.411,6.561 -7.568,6.573 -7.723,6.594 -7.878,6.623 -8.03,6.659 -8.181,6.704 -8.329,6.756 -8.474,6.816 -8.616,6.884 -8.754,6.959 -8.888,7.041 -9.017,7.13 -9.142,7.226 -9.261,7.328 -9.375,7.436 -9.483,7.55 -9.585,7.669 -9.681,7.794 -9.77,7.923 -9.852,8.057 -9.927,8.195 -9.995,8.337 -10.055,8.482 -10.107,8.63 -10.152,8.781 -10.188,8.933 -10.217,9.088 -10.238,9.243 -10.25,9.4 -10.254,9.557 -10.25,9.714 -10.238,9.871 -10.217,10.026 -10.188,10.181 -10.152,10.333 -10.107,10.484 -10.055,10.632 -9.995,10.777 -9.927,10.919 -9.852,11.057 -9.77,11.191 -9.681,11.32 -9.585,11.445 -9.483,11.564 -9.375,11.678 -9.261,11.786 -9.142,11.888 -9.017,11.984 -8.888,12.073 -8.754,12.155 -8.616,12.23 -8.474,12.298 -8.329,12.358 -8.181,12.41 -8.03,12.455 -7.878,12.491 -7.723,12.52 -7.568,12.541 -7.411,12.553 -7.254,12.557 -5.254,12.557
  SIGNAL region: -3.066,12.554 -2.968,12.547 -2.87,12.537 -2.772,12.524 -2.675,12.507 -2.578,12.488 -2.482,12.465 -2.387,12.438 -2.293,12.409 -2.199,12.376 -2.107,12.34 -2.017,12.302 -1.927,12.26 -1.839,12.215 -1.753,12.167 -1.668,12.116 -1.585,12.063 -1.504,12.007 -1.425,11.948 -1.348,11.886 -1.273,11.822 -1.2,11.755 -1.13,11.686 -1.062,11.615 -0.996,11.541 -0.933,11.465 -0.872,11.387 -0.814,11.307 -0.754,11.217 -0.754,7.897 -0.814,7.807 -0.872,7.727 -0.933,7.649 -0.996,7.573 -1.062,7.499 -1.13,7.428 -1.2,7.359 -1.273,7.292 -1.348,7.228 -1.425,7.166 -1.504,7.107 -1.585,7.051 -1.668,6.998 -1.753,6.947 -1.839,6.899 -1.927,6.854 -2.017,6.812 -2.107,6.774 -2.199,6.738 -2.293,6.705 -2.387,6.676 -2.482,6.649 -2.578,6.626 -2.675,6.607 -2.772,6.59 -2.87,6.577 -2.968,6.567 -3.066,6.56 -3.165,6.557 -5.254,6.557 -5.254,8.557 -3.254,8.557 -3.202,8.558 -3.149,8.562 -3.098,8.569 -3.046,8.579 -2.995,8.591 -2.945,8.606 -2.896,8.623 -2.847,8.643 -2.8,8.666 -2.754,8.691 -2.709,8.718 -2.666,8.748 -2.625,8.78 -2.585,8.814 -2.547,8.85 -2.511,8.888 -2.477,8.928 -2.445,8.969 -2.415,9.012 -2.388,9.057 -2.363,9.103 -2.34,9.15 -2.32,9.199 -2.303,9.248 -2.288,9.298 -2.276,9.349 -2.266,9.401 -2.259,9.452 -2.255,9.505 -2.254,9.557 -2.255,9.609 -2.259,9.662 -2.266,9.713 -2.276,9.765 -2.288,9.816 -2.303,9.866 -2.32,9.915 -2.34,9.964 -2.363,10.011 -2.388,10.057 -2.415,10.102 -2.445,10.145 -2.477,10.186 -2.511,10.226 -2.547,10.264 -2.585,10.3 -2.625,10.334 -2.666,10.366 -2.709,10.396 -2.754,10.423 -2.8,10.448 -2.847,10.471 -2.896,10.491 -2.945,10.508 -2.995,10.523 -3.046,10.535 -3.098,10.545 -3.149,10.552 -3.202,10.556 -3.254,10.557 -5.254,10.557 -5.254,12.557 -3.165,12.557
  SIGNAL region: 4.746,10.557 2.746,10.557 2.694,10.556 2.641,10.552 2.59,10.545 2.538,10.535 2.487,10.523 2.437,10.508 2.388,10.491 2.339,10.471 2.292,10.448 2.246,10.423 2.201,10.396 2.158,10.366 2.117,10.334 2.077,10.3 2.039,10.264 2.003,10.226 1.969,10.186 1.937,10.145 1.907,10.102 1.88,10.057 1.855,10.011 1.832,9.964 1.812,9.915 1.795,9.866 1.78,9.816 1.768,9.765 1.758,9.713 1.751,9.662 1.747,9.609 1.746,9.557 1.747,9.505 1.751,9.452 1.758,9.401 1.768,9.349 1.78,9.298 1.795,9.248 1.812,9.199 1.832,9.15 1.855,9.103 1.88,9.057 1.907,9.012 1.937,8.969 1.969,8.928 2.003,8.888 2.039,8.85 2.077,8.814 2.117,8.78 2.158,8.748 2.201,8.718 2.246,8.691 2.292,8.666 2.339,8.643 2.388,8.623 2.437,8.606 2.487,8.591 2.538,8.579 2.59,8.569 2.641,8.562 2.694,8.558 2.746,8.557 4.746,8.557 4.746,6.557 2.657,6.557 2.558,6.56 2.46,6.567 2.362,6.577 2.264,6.59 2.167,6.607 2.07,6.626 1.974,6.649 1.879,6.676 1.785,6.705 1.691,6.738 1.599,6.774 1.509,6.812 1.419,6.854 1.331,6.899 1.245,6.947 1.16,6.998 1.077,7.051 0.996,7.107 0.917,7.166 0.84,7.228 0.765,7.292 0.692,7.359 0.622,7.428 0.554,7.499 0.488,7.573 0.425,7.649 0.364,7.727 0.306,7.807 0.246,7.897 0.246,11.217 0.306,11.307 0.364,11.387 0.425,11.465 0.488,11.541 0.554,11.615 0.622,11.686 0.692,11.755 0.765,11.822 0.84,11.886 0.917,11.948 0.996,12.007 1.077,12.063 1.16,12.116 1.245,12.167 1.331,12.215 1.419,12.26 1.509,12.302 1.599,12.34 1.691,12.376 1.785,12.409 1.879,12.438 1.974,12.465 2.07,12.488 2.167,12.507 2.264,12.524 2.362,12.537 2.46,12.547 2.558,12.554 2.657,12.557 4.746,12.557
  SIGNAL region: 6.903,12.553 7.06,12.541 7.215,12.52 7.37,12.491 7.522,12.455 7.673,12.41 7.821,12.358 7.966,12.298 8.108,12.23 8.246,12.155 8.38,12.073 8.509,11.984 8.634,11.888 8.753,11.786 8.867,11.678 8.975,11.564 9.077,11.445 9.173,11.32 9.262,11.191 9.344,11.057 9.419,10.919 9.487,10.777 9.547,10.632 9.599,10.484 9.644,10.333 9.68,10.181 9.709,10.026 9.73,9.871 9.742,9.714 9.746,9.557 9.742,9.4 9.73,9.243 9.709,9.088 9.68,8.933 9.644,8.781 9.599,8.63 9.547,8.482 9.487,8.337 9.419,8.195 9.344,8.057 9.262,7.923 9.173,7.794 9.077,7.669 8.975,7.55 8.867,7.436 8.753,7.328 8.634,7.226 8.509,7.13 8.38,7.041 8.246,6.959 8.108,6.884 7.966,6.816 7.821,6.756 7.673,6.704 7.522,6.659 7.37,6.623 7.215,6.594 7.06,6.573 6.903,6.561 6.746,6.557 4.746,6.557 4.746,8.557 6.746,8.557 6.798,8.558 6.851,8.562 6.902,8.569 6.954,8.579 7.005,8.591 7.055,8.606 7.104,8.623 7.153,8.643 7.2,8.666 7.246,8.691 7.291,8.718 7.334,8.748 7.375,8.78 7.415,8.814 7.453,8.85 7.489,8.888 7.523,8.928 7.555,8.969 7.585,9.012 7.612,9.057 7.637,9.103 7.66,9.15 7.68,9.199 7.697,9.248 7.712,9.298 7.724,9.349 7.734,9.401 7.741,9.452 7.745,9.505 7.746,9.557 7.745,9.609 7.741,9.662 7.734,9.713 7.724,9.765 7.712,9.816 7.697,9.866 7.68,9.915 7.66,9.964 7.637,10.011 7.612,10.057 7.585,10.102 7.555,10.145 7.523,10.186 7.489,10.226 7.453,10.264 7.415,10.3 7.375,10.334 7.334,10.366 7.291,10.396 7.246,10.423 7.2,10.448 7.153,10.471 7.104,10.491 7.055,10.508 7.005,10.523 6.954,10.535 6.902,10.545 6.851,10.552 6.798,10.556 6.746,10.557 4.746,10.557 4.746,12.557 6.746,12.557
  silkscreen extent -5.25,-13.46 4.75,4.31, body extent -7.25,-12.28 6.75,10.31, height 7.1
"CURRENT TRANSFORMER" [mil]
  round 61 smd far side: S1(-10,230) S2(-10,-230)
  body extent -211,-358 191,358, height 764
"DUAL DIODE" [mm]
  rrect25% 1x0.65 on Mid2: 1(-1.201,1.146)
  rrect25% 1x0.65 smd far side: 2(-1.201,-0.894) 3(1.199,0.126)
  body extent -1.3,-1.39 1.3,1.65, height 1.3
"FAST SWITCHING DIODE"#1 [mm]
  rect 1.2x0.75 smd: 1(-1.573,-0.127) 2(1.827,-0.127)
  silkscreen extent -2.17,-0.9 1.48,0.65, body extent -1.72,-1.02 1.98,0.76, height 1
"FAST SWITCHING DIODE"#2 [mm]
  rect 1.2x0.75 smd: 1(-1.573,-0.127)
  rect 1.2x0.75 on Mid1: 2(1.827,-0.127)
  silkscreen extent -2.17,-0.9 1.48,0.65, body extent -1.72,-1.02 1.98,0.76, height 1
"FERRITE BEAD" [mm]
  rect 1.14x1.47 smd far side: 1(-1.017,0)
  rect 1.14x1.47 on Mid1: 2(0.763,0)
  body extent -1.13,-0.54 0.87,0.51, height 1.23
"GATE DRIVER" [mm]
  rect 2x0.6 smd paste+0 mask+0: 1(-4.635,4.624) 4(-4.635,0.814) 5(-4.635,-0.456) 6(-4.635,-1.726) 7(-4.635,-2.996) 8(-4.635,-4.266) 9(4.665,-4.266) 10(4.665,-2.996) 16(4.665,4.624)
  rect 2x0.6 on Mid1 paste+0 mask+0: 2(-4.635,3.354) 15(4.665,3.354)
  rect 2x0.6 on Mid2 paste+0 mask+0: 3(-4.635,2.084) 11(4.665,-1.726)
  rect 2x0.6 smd far side paste+0 mask+0: 12(4.665,-0.456) 13(4.665,0.814) 14(4.665,2.084)
  silkscreen extent -5.41,5.35 -5.16,5.6, body extent -5.15,-4.97 5.18,5.33, height 2.65
HEATSINK [mm] "694-50"
  rect 4.005x4.005 hole 2.67: 1(-23.749,-1.016)
  round 4.005 hole 2.67: 2(22.191,-1.016)
  body extent -25.76,-11.43 24.24,10.67, height 35.81
MOSFET#1 [mm]
  rect 2.715x2.715 / inner round 2.715 / far side rect 2.715x2.715 hole 1.81: 1(-4.953,-0.635)
  round 2.715 smd: 2(0.497,-0.635) 3(5.947,-0.635)
  silkscreen extent -7.38,-2.79 8.37,2.36, body extent -7.3,-2.79 8.3,2.36, height 24.45
MOSFET#2 [mm]
  rect 2.715x2.715 / inner round 2.715 / far side rect 2.715x2.715 hole 1.81: 1(-4.953,-0.635)
  round 2.715 smd: 2(0.497,-0.635)
  round 2.715 on Mid1: 3(5.947,-0.635)
  silkscreen extent -7.38,-2.79 8.37,2.36, body extent -7.3,-2.79 8.3,2.36, height 24.45
MOSFET#3 [mm]
  rect 2.715x2.715 smd: 1(-4.953,-0.635)
  round 2.715 smd: 2(0.497,-0.635)
  round 2.715 on Mid1: 3(5.947,-0.635)
  silkscreen extent -7.38,-2.79 8.37,2.36, body extent -7.3,-2.79 8.3,2.36, height 24.45
MOV [mm] "B72220S0421K101"
  rect 1.8x1.8 on Mid1: 1(-4.445,0.889)
  round 1.875 smd: 2(5.461,-1.143)
  body extent -9.99,-2.03 11.01,1.77, height 25.72
RECTIFIER [mm]
  rect 1.59x1.59 on Mid2: 1(-5.18,0.127)
  round 1.59 smd: 2(5.18,0.127)
  silkscreen extent -6.9,-1.05 4,1.3, body extent -5.57,-1.22 5.57,1.48, height 2.69
"TEMP SENSOR" [mm]
  rect 1.4x1.4 on Mid2 mask+0.05: 1(-2.6,0)
  round 1.4 smd far side mask+0.05: 2(0,0)
  round 1.4 on Mid1 mask+0.05: 3(2.6,0)
  silkscreen extent -2.23,-1.33 2.23,2.35, body extent -2.83,-1.33 2.83,2.35, height 9.34
TVS [mm]
  rect 2.12x1.5 on Mid1 paste+0 mask+0.102: A(2.115,-0.127)
  rect 2.12x1.5 on Mid2 paste+0 mask+0.102: C(-2.115,-0.127)
  silkscreen extent -4,-1.41 2.16,1.15, body extent -2.4,-1.52 2.65,1.18, height 2.19
"ZENER DIODE" [mm]
  rrect25% 1.1x1.1 smd: 1(-1.451,-0.11) 2(1.949,-0.11)
  silkscreen extent -2.35,-1.11 2.07,0.89, body extent -1.65,-0.91 2.15,0.69, height 1

## Part data
C1 C7: "EEU-FR1H220"
C2 C9: "CL21B105MBFNNNE"
C3 C8 C18: "C1206C105K1RACTU"
C4: "ECW-FE2J105QD"
C5 C6: "ELG477M450AT6AA"
C10 C11 C12: "ECW-FD2J333JB"
C13 C14 C20: "C315C102KAG5TA"
C15 C16 C17: "ECWFE2W225KA"
C19 C21 C22 R28: "C1210C104K1RACAUTO"
D1 D2: "MUR160G"
D3 D6 D9 D10: "1N4148W-7-F"
D4 D5 D7 D8: "BZT52C18"
D11: "BAT54C"
F1: "BLM21PG221SN1D"
G1 G2: "IR2110"
H1 H4: "694-50"
L1: "RLB0914-222KL"
P1: "TSW-114-07-G-S"
P2 P3 P4: "KF301-2P"
Q1 Q2 Q3 Q4: "STW69N65M5"
Q5: "LM7805S"
R3 R9 R15 R16 R19 R21 R22: "PTF651M0000BYEA"
R4 R12: "CFR-25JB-52-100R"
R5 R6 R10 R11: "CFR-25JR-52-22R"
R7 R8 R14 R18 R20 R29: "MF0207FRE52-1K"
R13 R17 R23 R24 R25 R26 R27 R31 R32 R33: "RC1206FR-0710KL"
R30: "MF0207FTE52-49R9"
T1: "SMAJ15A"
T2: "ZMCT103C"
T6: "LM35DZ"
V1: "B72220S0421K101"
W1: "ACS758LCB-050B-PFF-T"

## Free pads (board coordinates)
  round 1.524 hole 5: 1(6.35,127.508) 1(6.858,5.969) 1(156.845,6.096) 1(157.607,126.492)

## Via types
v1: diameter 0.9, hole 0.4, POWER to SIGNAL, 7 vias
v2: diameter 1.27, hole 0.8, POWER to SIGNAL, 1 vias

## Nets (pads, with @x,y where several pads share a name; then routed paths per layer and width w, separated by ;. In a path a pad name is that pad's centre, name@x,y a point inside that pad or via, vN(x,y) a via of type N, cw(c..) or ccw(c..) an arc to the next point about the centre after c; other vN are vias at no path point)
+3.3V: D11.1 P1.14 R26.1 R27.2 | length 36.2
  LOW POWER w0.406: R27.2 144.907,76.2 147.952,73.155 147.952,69.671 D11.1 148.199,69.599 148.321,69.477 148.321,69.302 149.225,68.398 149.225,59.817 147.952,58.544 147.952,52.2 149.352,50.8 P1.14 R26.1
+5: C1.P C7.P C21.1 C22.1 G1.11 G2.11 Q5.3 T6.1 W1.1 | length 212.3
  LOW POWER w0.508: W1.1 18.156,46.741 25.781,39.116 25.781,24.892 21.759,20.87 Q5.3 v1(19.939,17.78) ; v1(19.939,13.462) 24.257,9.144 C1.P ; G1.11@61.595,13.768 63.728,13.768 C21.1 64.897,13.843 65.659,13.081 65.659,10.16 C1.P ; T6.1 106.68,48.962 106.68,21.209 103.251,17.78 C7.P 101.694,13.413 C22.1 ccw(c98.122,13.413) 98.122,13.462 G2.11 95.233,13.416 93.934,13.416 93.218,12.7 93.218,6.477 91.567,4.826 65.659,4.826 64.643,5.842 C1.P
  SIGNAL w0.508: v1(19.939,13.462) v1(19.939,17.78)
+12: D1.1 D2.1 G1.3 G2.3 P4.1 Q5.1 T1.C | length 66.2
  LOW POWER w0.712: Q5.1 14.859,16.931 16.55,15.24 ; G1.3 52.849,17.578 54.622,19.351 54.622,19.939 ; 83.058,17.526 83.312,17.272 G2.3
  LOW POWER w1.524: T1.C@9.652,18.339 T1.C ; 16.55,15.24 37.619,15.24 D1.1 ; 54.622,19.939 80.645,19.939 83.058,17.526
+380V: C4.1 C5.1 C6.1 C10.1 C11.1 C12.1 D3.1 D9.1 P3.1 Q1.2 Q2.2 R3.2 R4.2 R12.2 R15.2 V1.2 W1.4 W1.4_1 W1.4_2 W1.4_3 W1.4_4 W1.4_5 W1.4_6 W1.4_7 W1.4_8 W1.4_9 W1.4_10 W1.4_11 W1.4_12 W1.4_13 W1.4_14 W1.4_15 W1.4_16 W1.5 W1.5_1 W1.5_2 W1.5_3 W1.5_4 W1.5_5 W1.5_6 W1.5_7 W1.5_8 W1.5_9 W1.5_10 W1.5_11 W1.5_12 W1.5_13 W1.5_14 W1.5_15 W1.5_16
AC_LINE: C15.1 C16.1 C17.1 D3.2 D6.1 L1.1 L1.2 P2.2 Q1.3 Q3.2 R8.2 R21.2
AC_NEUTRAL: C15.2 C16.2 C17.2 C19.2 D9.2 D10.1 P2.1 Q2.3 Q4.2 R7.1 R25.1
COUT_FB: P1.12 R29.2 | length 18
  SIGNAL w0.381: R29.2 137.668,51.054 140.434,48.288 144.244,48.288 P1.12
CURRENT_FB: C13.1 P1.7 W1.3 | length 239.1
  SIGNAL w0.305: W1.3 21.976,74.808 C13.1 21.971,72.644 10.287,60.96 10.287,21.082 29.591,1.778 77.925,1.778 77.928,1.775 79.298,1.775 79.301,1.778 146.304,1.778 153.289,8.763 153.289,26.543 P1.7
HIN_A: G1.12 P1.4 | length 116
  SIGNAL w0.356: G1.12 66.115,15.038 68.58,12.573 68.58,8.128 74.295,2.413 145.034,2.413 152.273,9.652 152.273,19.939 P1.4
HIN_B: G2.12 P1.1 | length 54.3
  SIGNAL w0.381: G2.12 147.193,14.732 147.701,15.24 P1.1
LIN_A: G1.14 P1.3 | length 108.8
  SIGNAL w0.356: G1.14@61.543,17.578 64.771,17.578 65.523,16.826 66.867,16.826 70.866,12.827 70.866,8.128 72.644,6.35 145.796,6.35 151.384,11.938 151.384,18.288 P1.3
LIN_B: G2.14 P1.2 | length 54.3
  SIGNAL w0.381: G2.14 148.576,17.272 149.084,17.78 P1.2
NetC2_1: C2.1 C3.1 G1.6 | length 5
  POWER w1.27: C2.1@46.997,13.722 C3.1@49.128,13.722 ; C3.1 49.458,13.722 49.788,13.722 49.834,13.768 G1.6
NetC2_2: C2.2 C3.2 D1.2 G1.7 | length 16.9
  POWER w1.016: C2.2 46.973,11.956 45.448,11.956 44.704,12.7 44.704,15.748 45.847,16.891 D1.2 ; C2.2@47.155,11.939 48.305,10.789 49.331,10.789 C3.2 49.733,10.717 50.499,11.483 50.499,11.844 51.026,12.371 G1.7@51.608,12.371
NetC8_1: C8.1 C9.1 G2.6
NetC8_2: C8.2 C9.2 D2.2 G2.7 | length 12.6
  POWER w1: C9.2 85.286,12.193 G2.7@85.404,12.311
  POWER w1.016: G2.7@85.404,12.311 G2.7@86.106,12.311
  POWER w1.27: D2.2 77.016,11.103 78.105,12.192 80.85,12.192 80.899,12.241 80.93,12.21 83.295,12.21 C9.2
NetC14_1: C14.1 R4.1 | length 4.5
  POWER w1.524: R4.1 C14.1
NetC18_1: C18.1 R30.2 T2.S1 | length 10.6
  SIGNAL w0.508: C18.1 144.927,87.688 148.063,87.688 R30.2 148.19,87.776 155.34,87.776 T2.S1
NetC18_2: C18.2 R27.1 R28.1 R29.1 R31.2 | length 31.4
  SIGNAL w0.508: R29.1 141.859,74.168 144.018,74.168 144.526,73.66 144.526,70.993 144.824,70.695 145.675,70.695 146.001,70.369 R28.1 145.988,70.117 145.988,72.759 R31.2 146.05,72.845 146.05,74.041 144.399,75.692 143.046,75.692 142.748,75.99 142.748,79.809 144.286,81.347 144.286,81.697 144.557,81.968 R27.1 C18.2
NetC19_1: C19.1 R20.1 R23.1 | length 52.3
  SIGNAL w0.381: R20.1 135.89,66.04 135.89,80.725 144.96,89.795 R23.1 146.685,91.313 150.749,95.377 C19.1@150.749,97.839
NetC20_1: C20.1 R12.1 | length 3.8
  POWER w1.016: C20.1@68.365,67.095 R12.1
NetD4_1: D4.1 G1.8 R5.1 | length 28.4
  POWER w1.016: G1.8 54.535,11.228 56.388,13.081 56.388,20.32 61.663,25.595 62.75,25.595 D4.1 ; v1(67.183,25.654) 67.818,25.019 R5.1
  LOW POWER w1.016: 62.738,25.654 v1(67.183,25.654)
NetD4_2: D4.2 Q1.1 R5.2 R8.1 | length 17.7
  POWER w1.016: R5.2 56.488,22.733 59.414,25.659 59.414,29.823 Q1.1 60.286,28.995 62.141,28.995 63.323,27.813 R8.1
NetD5_1: D5.1 G2.8 R6.1 | length 22.7
  POWER w1.2: G2.8 88.646,10.922
  POWER w1.27: R6.1 84.565,22.496 D5.1 89.354,11.63 88.646,10.922
NetD5_2: D5.2 Q2.1 R6.2 R7.2 | length 38.4
  POWER w1.27: R7.2 74.777,42.534 cw(c74.811,41.265) 75.519,42.319 75.522,42.317 76.747,41.49 Q2.1 82.144,40.767 R6.2 86.843,40.792 94.615,33.02 94.615,24.357 D5.2
NetD7_1: D7.1 G1.1 R10.1 | length 9.7
  POWER w1.016: D7.1 46.519,20.066 R10.1 50.064,20.092 52.235,20.092 G1.1
NetD7_2: D7.2 Q3.1 R10.2 R18.1 | length 48.6
  POWER w1.016: R10.2 37.565,20.066 D7.2 40.342,38.056 R18.1 56.338,54.379 cw(c57.112,53.721) 57.112,54.737 58.586,54.737 Q3.1
NetD8_1: D8.1 G2.1 R11.1 | length 13.8
  POWER w1.27: D8.1 75.475,14.207 79.429,18.161 R11.1 83.628,18.161 85.279,19.812 G2.1
NetD8_2: D8.2 Q4.1 R11.2 R14.2 | length 61.8
  POWER w1.27: v2(65.151,28.956) 65.151,19.279 R11.2 70.223,14.207 D8.2 ; 73.914,65.811 77.318,65.811 Q4.1
  LOW POWER w1.27: v2(65.151,28.956) 65.151,57.048 R14.2
NetR3_1: R3.1 R9.2
NetR9_1: R9.1 R19.2
NetR15_1: R15.1 R16.2 | length 34
  SIGNAL w0.508: R15.1 R16.2@110.871,3.683
NetR21_1: R21.1 R22.2 | length 5.7
  SIGNAL w0.712: R21.1 115.358,54.398 R22.2@120.989,54.398
NetR22_1: R22.1 R23.2 R25.2 | length 27.5
  SIGNAL w0.381: R22.1 125.56,78.74 130.46,83.64 R25.2 136.472,83.64 142.06,89.228 R23.2
NetR30_1: R30.1 T2.S2 | length 7.6
  SIGNAL w0.712: R30.1 154.752,76.669 155.221,76.2 T2.S2
PGND: C1.N C4.2 C5.2 C6.2 C7.N C10.2 C11.2 C12.2 C13.2 C14.2 C20.2 C21.2 C22.2 D6.2 D10.2 F1.2 G1.2 G1.15 G2.2 G2.15 P3.2 P4.2 Q3.3 Q4.3 Q5.2 Q5.4 R14.1 R17.1 R18.2 R19.1 R32.1 R33.1 T1.A T6.3 V1.1 W1.2
SD_FAULT: G1.13 G2.13 P1.8 R13.2 R32.2 R33.2 | length 179.8
  LOW POWER w0.381: v1(145.415,4.826) 145.421,4.832 146.437,4.832 v1(154.305,12.7)
  SIGNAL w0.381: G1.13@61.561,16.255 64.083,16.255 R32.2 66.347,16.203 69.977,12.573 69.977,7.747 72.898,4.826 v1(145.415,4.826) ; G1.13 59.892,16.308 58.801,17.399 58.801,18.415 59.944,19.558 89.916,19.558 93.472,16.002 G2.13 95.316,16.039 97.626,16.039 R33.2 ; R13.2 152.273,35.941 P1.8 149.352,32.131 154.305,27.178 v1(154.305,12.7)
SGND: D11.2 F1.1 P1.13 R13.1 R24.1 R28.2 R31.1 | length 74.7
  LOW POWER w0.813: v1(136.337,36.83) 139.573,40.066 139.573,49.022 v1(140.843,50.292)
  SIGNAL w0.508: R31.1 143.063,72.758 143.063,70.116 R28.2 R28.2@143.051,69.677 ; D11.2 146.055,67.559 146.05,67.564 145.883,67.564 144.095,69.351 143.377,69.351 R28.2@143.051,69.677 ; R13.1 152.154,43.606 151.466,43.606 P1.13 144.854,50.218 R24.1 142.564,50.275 140.86,50.275 v1(140.843,50.292) 145.034,54.483 147.066,54.483 147.066,57.785 143.051,61.8 143.051,69.324 R28.2@143.051,69.677
  SIGNAL w0.813: F1.1 v1(136.337,36.83)
TEMP_FB: P1.10 T6.2 | length 48.4
  SIGNAL w0.381: T6.2 131.191,51.689 144.653,38.227 149.225,38.227 P1.10
VBUS_FB: P1.9 R16.1 R17.2 | length 53.9
  SIGNAL w0.305: R17.2 103.369,21.971 109.338,27.94 141.732,27.94 P1.9
VOUT_FB: D11.3 P1.11 R20.2 R24.2 R26.2 | length 44.9
  SIGNAL w0.508: R24.2 142.621,43.409 R20.2 145.339,40.691 149.301,40.691 P1.11 150.495,41.783 152.687,41.783 154.612,43.708 R26.2 154.559,48.313 154.559,52.07 150.424,56.205 D11.3
pads on no net: G1.4 G1.5 G1.9 G1.10 G1.16 G2.4 G2.5 G2.9 G2.10 G2.16 H1.1 H1.2 H4.1 H4.2 P1.5 P1.6

## Polygon pours and split planes (outlines as drawn)
+12 on LOW POWER "NONET_L03_P023" (solid, shelved, pour order 23): 33.02,21.336 cw(c35.433,21.336) 35.433,23.749 52.07,23.749 cw(c52.07,21.209) 54.61,21.209 54.61,12.319 cw(c52.07,12.319) 52.07,9.779 35.56,9.779 cw(c35.56,12.319) 33.02,12.319
+12 on LOW POWER "NONET_L03_P022" (solid, shelved, pour order 22): 0.635,36.195 cw(c3.175,36.195) 3.175,38.735 21.971,38.735 cw(c21.971,36.195) 24.511,36.195 24.511,26.924 cw(c21.971,26.924) 21.971,24.384 18.923,24.384 ccw(c18.923,23.622) 18.161,23.622 18.161,11.43 cw(c15.621,11.43) 15.621,8.89 1.651,8.89 cw(c1.651,9.906) 0.635,9.906 0.635,25.146
+12 on LOW POWER "NONET_L03_P026" (solid, shelved, pour order 26): 77.216,5.715 cw(c77.216,8.255) 74.676,8.255 74.676,21.59 cw(c77.216,21.59) 77.216,24.13 97.028,24.13 cw(c97.028,21.59) 99.568,21.59 99.568,15.113 cw(c98.933,15.113) 98.933,14.478 94.488,14.478 ccw(c94.488,12.319) 92.329,12.319 92.329,8.255 cw(c89.789,8.255) 89.789,5.715
AC_NEUTRAL on POWER "NONET_L01_P021" (solid, shelved, pour order 21): 149.225,131.445 149.225,102.108 cw(c146.685,102.108) 146.685,99.568 121.92,99.568 ccw(c121.92,97.028) 119.38,97.028 119.38,68.58 cw(c116.84,68.58) 116.84,66.04 cw(c116.84,3814.61) 81.183,66.21 ccw(c81.114,58.939) 74.168,61.087 ccw(c82.081,58.528) 73.787,59.14 73.787,54.229 ccw(c76.327,54.229) 76.327,51.689 cw(c76.241,43.284) 83.036,48.233 cw(c76.088,46.253) 83.312,46.304 83.312,41.021 ccw(c85.852,41.021) 85.852,38.481 86.106,38.481 cw(c86.106,37.719) 86.868,37.719 86.868,33.147 cw(c85.344,33.147) 85.344,31.623 68.707,31.623 ccw(c68.707,29.083) 66.167,29.083 66.167,3.302 ccw(c68.707,3.302) 68.707,0.762 138.938,0.762 ccw(c138.938,3.302) 141.478,3.302 141.478,63.881 cw(c144.018,63.881) 144.018,66.421 160.401,66.421 ccw(c160.401,68.961) 162.941,68.961 162.941,129.921 ccw(c161.417,129.921) 161.417,131.445
+380V on POWER "NONET_L01_P014" (solid, shelved, pour order 14): 1.016,97.917 1.016,128.905 cw(c3.556,128.905) 3.556,131.445 85.217,131.445 cw(c85.217,128.905) 87.757,128.905 87.757,94.869 cw(c85.217,94.869) 85.217,92.329 80.645,92.329 ccw(c80.645,89.789) 78.105,89.789 78.105,78.232 cw(c75.565,78.232) 75.565,75.692 65.786,75.692 ccw(c65.786,70.612) 64.301,75.47 ccw(c65.254,72.351) 62.069,73.051 cw(c56.824,74.204) 56.824,68.834 52.451,68.834 ccw(c52.451,66.294) 49.911,66.294 49.911,40.767 ccw(c52.451,40.767) 52.451,38.227 83.566,38.227 cw(c83.566,35.687) 86.106,35.687 86.106,34.544 cw(c83.566,34.544) 83.566,32.004 56.896,32.004 ccw(c56.896,29.464) 54.356,29.464 54.356,4.445 cw(c50.546,4.445) 50.546,0.635 3.175,0.635 cw(c3.175,3.175) 0.635,3.175 0.635,5.588
AC_LINE on POWER "NONET_L01_P020" (solid, shelved, pour order 20): 52.832,38.735 79.375,38.735 ccw(c79.375,40.005) 80.645,40.005 80.645,46.101 ccw(c76.2,46.101) 76.2,50.546 75.566,50.546 cw(c75.566,53.214) 72.898,53.214 72.898,65.279 cw(c74.804,65.277) 74.804,67.183 115.443,67.183 ccw(c115.443,69.723) 117.983,69.723 117.983,98.044 cw(c120.523,98.044) 120.523,100.584 145.288,100.584 ccw(c145.288,103.124) 147.828,103.124 147.828,128.905 ccw(c145.288,128.905) 145.288,131.445 90.805,131.445 ccw(c90.805,128.905) 88.265,128.905 88.265,94.869 cw(c84.836,94.869) 84.836,91.44 80.264,91.44 ccw(c80.264,89.789) 78.613,89.789 78.613,78.613 cw(c74.93,78.613) 74.93,74.93 64.643,74.93 ccw(c64.643,73.247) 62.974,73.467 cw(c56.965,74.26) 56.965,68.199 51.943,68.199 ccw(c51.943,66.548) 50.292,66.548 50.292,41.275 ccw(c52.832,41.275)
PGND on PGND/SGND "NONET_L02_P000" (solid, shelved, pour order 0): 0.762,128.524 cw(c3.683,128.524) 3.683,131.445 109.347,131.445 cw(c109.347,127.127) 113.665,127.127 cw(c47.943,74.23) 132.207,70.104 cw(c38.53,66.408) 113.084,9.568 cw(c96.842,22.887) 98.962,1.99 6.392,1.99 cw(c6.392,7.62) 0.762,7.62

## Silkscreen, mask and mechanical layers (free items; w line width, h text height)
Bottom Overlay:
  text "DESIGNED BY AFRAAZ KHAN" at 145.542,1.905 h1